# Altium PCB Converter.PcbDoc
Units mm, origin at the board's own origin, x right, y up, seen from the top; angles counter-clockwise.
Board outline 14.5 x 46 mm, 4 copper layers (Top Layer, Layer 1, Layer 2, Bottom Layer), stack 0.603 mm thick; 40 components, 29 nets, 125 pads, 52 vias.
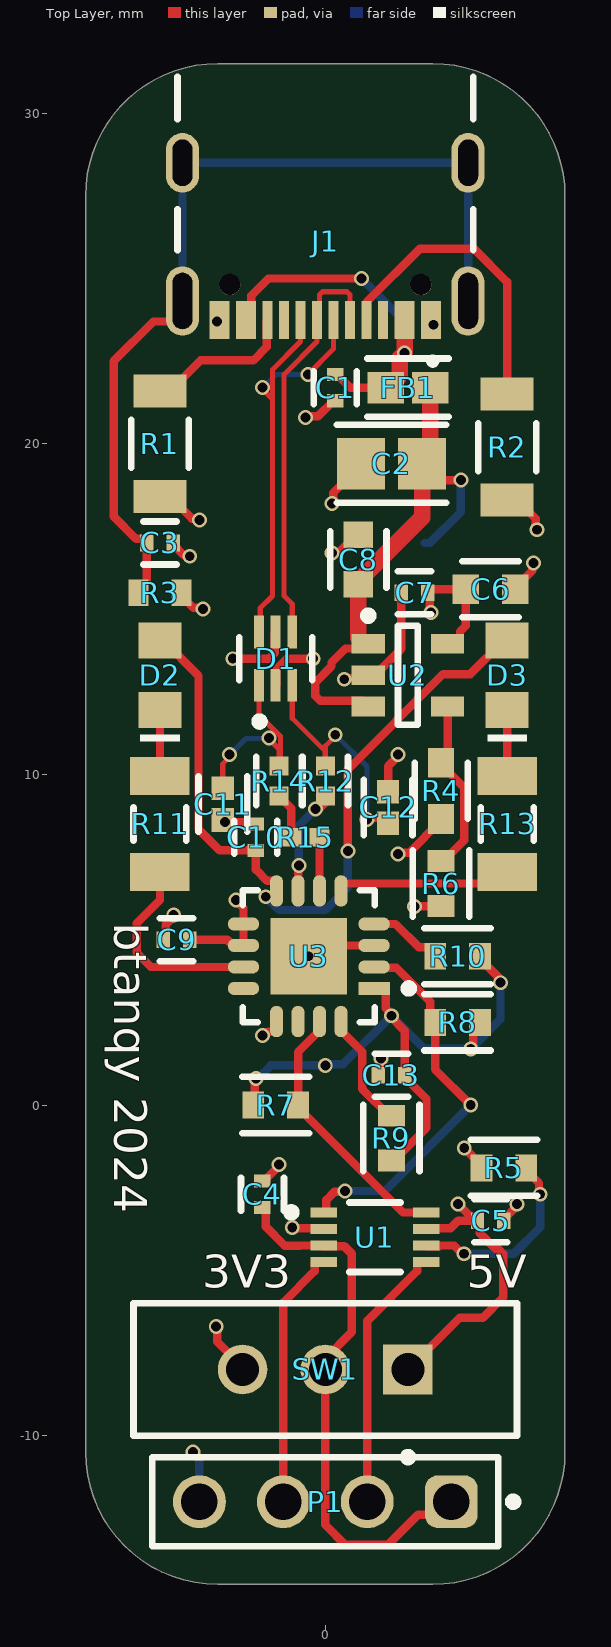
[diagram p0: Top Layer view]
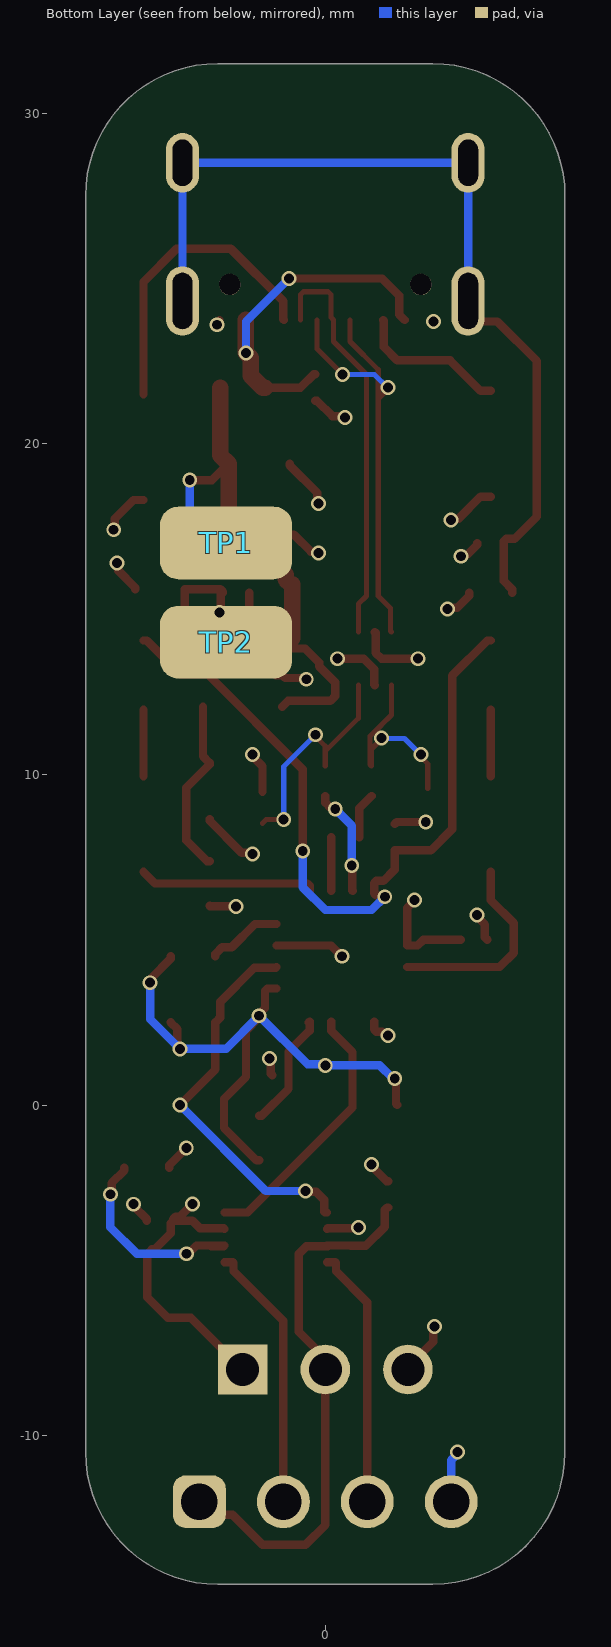
[diagram p1: Bottom Layer view, seen from below]
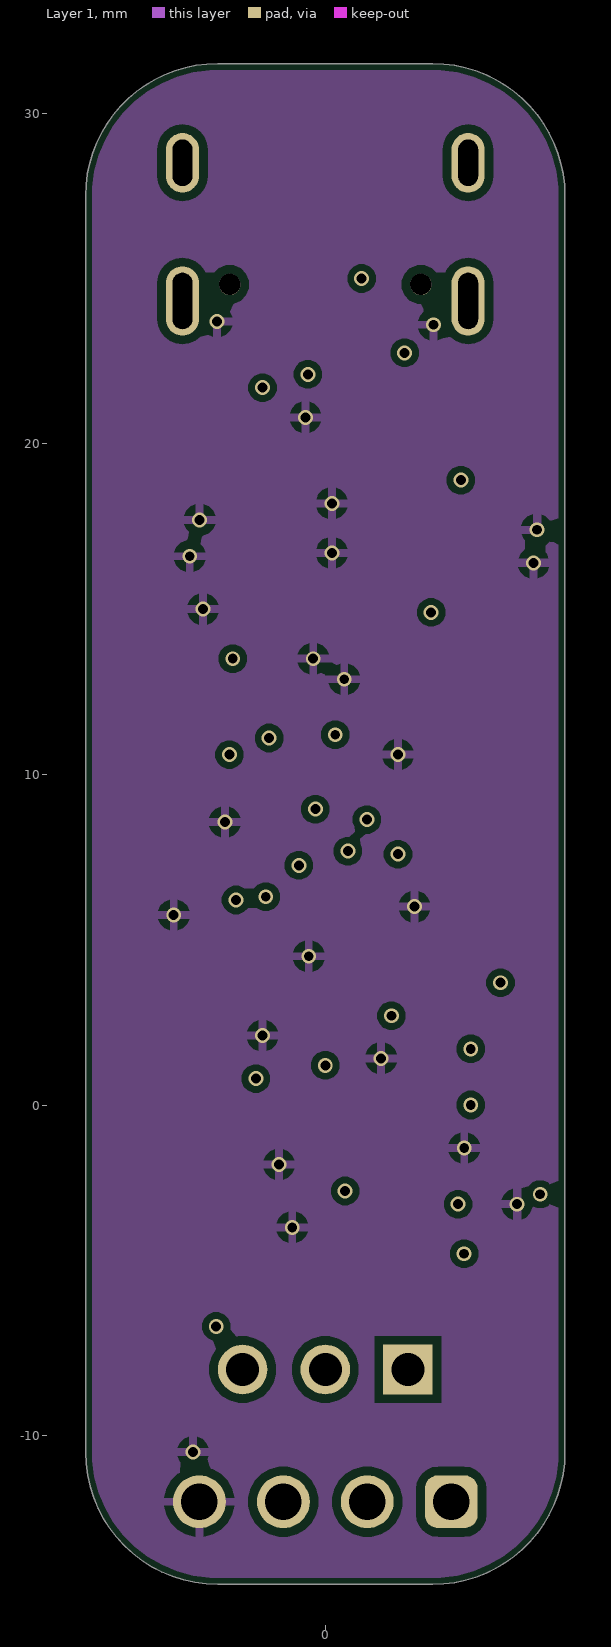
[diagram p2: Layer 1]
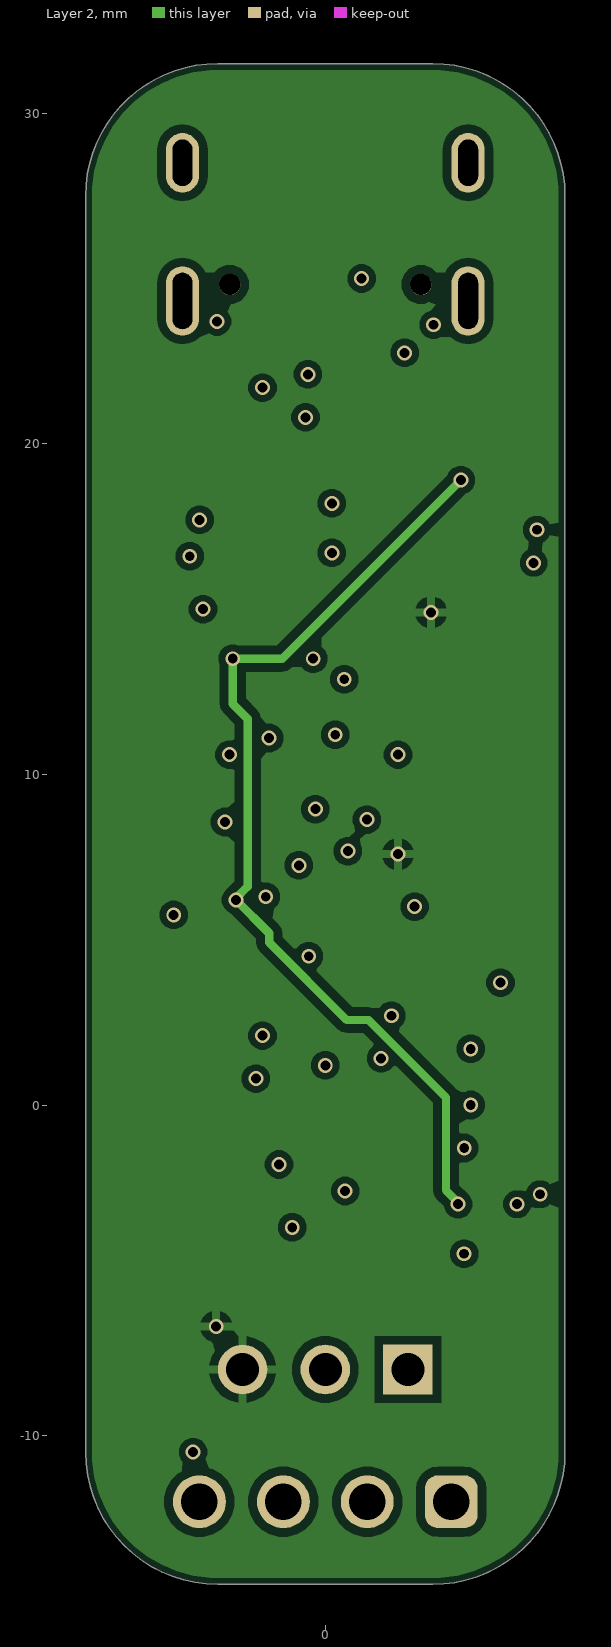
[diagram p3: Layer 2]
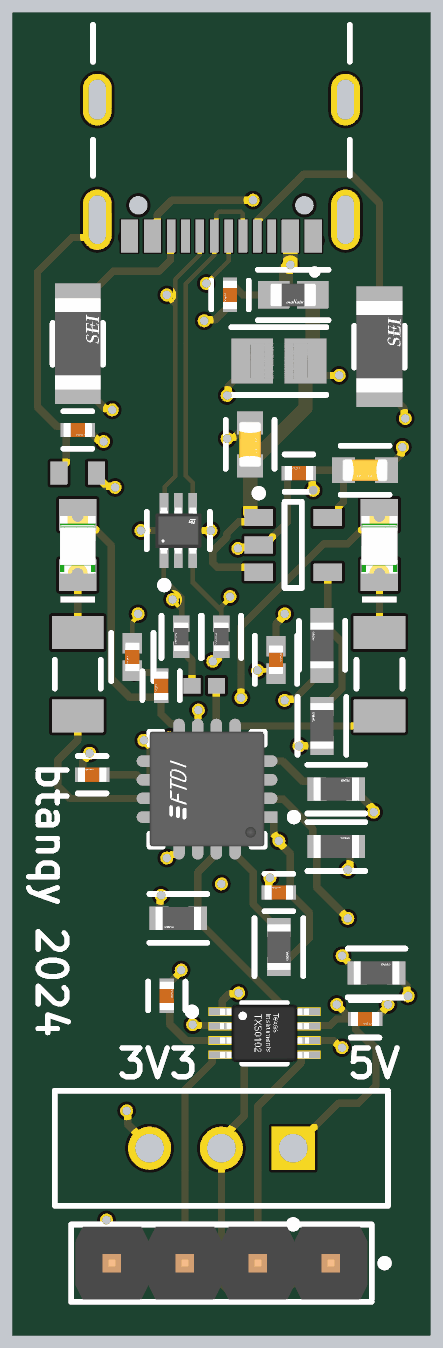
[diagram p4: 3D render of the assembled board from above, using the file's embedded part models]

## Layer stack, top to bottom
Top Solder: solder mask 0.0102, Solder Resist, Dk 3.5
Top Layer: signal copper 0.0356
Dielectric 2: prepreg 0.0711, PP-006, Dk 4.1
Layer 1: signal copper 0.035
Dielectric 1: dielectric 0.32, FR-4, Dk 4.8
Layer 2: signal copper 0.035
Dielectric 3: prepreg 0.0711, PP-006, Dk 4.1
Bottom Layer: signal copper 0.0356
Bottom Solder: solder mask 0.0102, Solder Resist, Dk 3.5

## Board outline
-7.25,-10.5 ccw(c-3.25,-10.5) -3.25,-14.5 3.25,-14.5 ccw(c3.25,-10.5) 7.25,-10.5 7.25,27.5 ccw(c3.25,27.5) 3.25,31.5 -3.25,31.5 ccw(c-3.25,27.5) -7.25,27.5

## Design rules (kind name [scope] priority, off if disabled: settings)
BoardOutlineClearance [All] p1: gap=0.254 ignorepadtopadclearanceinfootprint=FALSE except(0: Arc-SplitContinuation Track-SplitContinuation SMDPad-SplitContinuation THPad-SplitContinuation Via-SplitContinuation Fill-SplitContinuation Poly-SplitContinuation Region-SplitContinuation Text-SplitContinuation; 0.2: Arc-OutlineEdge Track-OutlineEdge SMDPad-OutlineEdge THPad-OutlineEdge Via-OutlineEdge Fill-OutlineEdge Poly-OutlineEdge Region-OutlineEdge Text-OutlineEdge)
Clearance [All] p1: gap=0.254 ignorepadtopadclearanceinfootprint=FALSE except(0.1: Arc-Arc Arc-Track Arc-SMDPad Arc-THPad Track-Track Track-SMDPad Track-THPad; 0.15: SMDPad-SMDPad; 0.2: Arc-Via Track-Via THPad-THPad Via-Via Via-Fill Via-Poly Via-Region; 0.35: SMDPad-Via)
ComponentClearance [All] p1: gap=0.1 collisioncheckmode=3 verticalgap=0.254 showdistances=FALSE
DiffPairsRouting [All] p1: maxlimit=0.254 minlimit=0.18 mostfreqgap=0.254 toplayer_maxgap=0.22 toplayer_prefgap=0.2 toplayer_minwidth=0.1 toplayer_maxwidth=0.2 toplayer_prefwidth=0.155 midlayer1_mingap=0.254 midlayer1_minwidth=0.381 midlayer1_maxwidth=0.381 midlayer1_prefwidth=0.381 midlayer2_mingap=0.254 midlayer2_minwidth=0.381 midlayer2_maxwidth=0.381 midlayer2_prefwidth=0.381 bottomlayer_mingap=0.254 bottomlayer_minwidth=0.381 bottomlayer_maxwidth=0.381 bottomlayer_prefwidth=0.381 maxuncoupledlength=12.7
MinimumSolderMaskSliver [All] p1: minsoldermaskwidth=0.1
PolygonConnect [All] p1: connectstyle=Relief reliefconductorwidth=0.254 reliefentries=4 polygonreliefangle="90 Angle" airgapwidth=0.254
RoutingVias [All] p1: holewidth=0.3 width=0.45 viastyle="Through Hole" minholewidth=0.3 minwidth=0.45 maxholewidth=10 maxwidth=10
SilkToSilkClearance [All] p1: silktosilkclearance=0.15
SolderMaskExpansion [All] p1: expansion=0.102 istentingtop=FALSE
SupplyNets "Schematic Supply Nets_2" [InNet('3V3')] p1: voltage=0.000
SupplyNets "Schematic Supply Nets_1" [InNet('VCC')] p2: voltage=0.000
SupplyNets "Schematic Supply Nets" [InNet('GND')] p3: voltage=0.000
Width [All] p1: maxlimit=10 minlimit=0.1 preferedwidth=0.254 midlayer1_minwidth=0.254 midlayer1_maxwidth=0.254 midlayer2_minwidth=0.254 midlayer2_maxwidth=0.254 minimp=50.000000 maximp=50.000000 favimp=50.000000
26 further rules are at their usual default settings.

## Classes and differential pairs
differential pair D: +D_P -D_N
differential pair DIN: +DIN_P -DIN_N

## Components (designator, comment, footprint, x,y, rotation, side; value= is the part's Value field where it differs from the comment)
C1 "GRM155R71C104KA88J" FP-GRM155-0_05-MFG 0.3,21.7 r270 top
C2 "CL21A475KAQNNNE" FP-CL21-IPC_A 2,19.4 r180 top
C3 "GRM155R71C104KA88J" FP-GRM155-0_05-MFG -5,17 r0 top
C4 "GRM155R71C104KA88J" FP-GRM155-0_05-MFG -1.9,-2.7 r90 top
C5 "GRM155R71C104KA88J" FP-GRM155-0_05-MFG 5,-3.5 r0 top
C6 "CC0603KRX7R7BB105" FP-CC0603-DA-MFG 5,15.6 r0 top value="1 uF"
C7 "GRM155R71C104KA88J" FP-GRM155-0_05-MFG 2.7,15.5 r180 top
C8 "CC0603KRX7R7BB105" FP-CC0603-DA-MFG 1,16.5 r90 top value="1 uF"
C9 "GRM155R71C104KA88J" FP-GRM155-0_05-MFG -4.5,5 r180 top
C10 "GRM155R71C104KA88J" FP-GRM155-0_05-MFG -2.1,8.1 r270 top
C11 "GJM1555C1H470GB01D" FP-GJM155-0_05-IPC_A -3.1,9.1 r270 top
C12 "GJM1555C1H470GB01D" FP-GJM155-0_05-IPC_A 1.9,9 r90 top
C13 "GRM155R71C104KA88J" FP-GRM155-0_05-MFG 2,0.9 r180 top
D1 "USBLC6-2P6" FP-SOT-666-MFG -1.5,13.5 r90 top
D2 "150080RS75000" WL-SMCW_0805_150080xx75000 -5,13 r90 top
D3 "150080RS75000" WL-SMCW_0805_150080xx75000 5.5,13 r90 top
FB1 "BLM18PG600SN1D" FP-BLM18-0_15-t0_8-IPC_B 2.5,21.7 r0 top
J1 "GT-USB-7010ASV" GCT_USB4105-GF-A 0,28.5 r180 top
P1 "61300411121" 61300411121 0,-12 r180 top
R1 "RMCF1206JT56K0" FP-RMCF1206-MFG -5,20 r90 top
R2 "RMCF1206JT56K0" FP-RMCF1206-MFG 5.5,19.9 r90 top
R3 "1M" RESC1608X55X25LL10T15 -5,15.5 r0 top
R4 "RT0603BRD0732KL" FP-RT0603-0_55-MFG 3.5,9.5 r90 top
R5 "RC0603FR-0710KL" FP-RC0603-0_55-IPC_C 5.4,-1.9 r0 top
R6 "RC0603FR-0710KL" FP-RC0603-0_55-IPC_C 3.5,6.7 r90 top
R7 "RC0603FR-0710KL" FP-RC0603-0_55-IPC_C -1.5,0 r180 top
R8 "RC0603FR-0710KL" FP-RC0603-0_55-IPC_C 4,2.5 r0 top
R9 "RC0603FR-0710KL" FP-RC0603-0_55-IPC_C 2,-1 r270 top
R10 "RC0603FR-0710KL" FP-RC0603-0_55-IPC_C 4,4.5 r0 top
R11 "62R 1% 1206(3216)" RESC1206(3216)_N -5,8.5 r270 top value=62.00
R12 "ERJ-2RKF27R0X" FP-ERJ2R-IPC_B 0,9.8 r270 top
R13 "62R 1% 1206(3216)" RESC1206(3216)_N 5.5,8.5 r270 top value=62.00
R14 "ERJ-2RKF27R0X" FP-ERJ2R-IPC_B -1.4,9.8 r270 top
R15 "RC0402JR-070RL" RESC1005X40X25NL05T10 -0.6,8.1 r180 top value=0
SW1 "EG1218" ESWI-EG1218_V 0,-8 r180 top
TP1 "RH-5019" RH-5019-Footprint-1 3,17 r180 bottom
TP2 "RH-5019" RH-5019-Footprint-1 3,14 r180 bottom
U1 "TXS0102DCUR" FP-DCU0008A-MFG 1.5,-4 r0 top
U2 "RS3236-ADJ8YF5" SOT95P245X110-5N 2.5,13 r0 top
U3 "FT230XQ-R" FP-QFN-16-MFG -0.5,4.5 r180 top

## Footprints (in the part's own frame and the unit in brackets; to place one, negate y for a bottom-side part, rotate by r counter-clockwise, add the part's x,y. Pads: shape width x height; smd on the part's side, far side on the other; paste and mask are expansions set on the pad)
61300411121 [mm] "Pin Header, pitch 2.54 mm, THT, Vertical, single row, 4p"
  rrect50% 1.6x1.6 hole 1.1: 1(-3.81,0)
  round 1.6 hole 1.1: 2(-1.27,0) 3(1.27,0) 4(3.81,0)
  silkscreen extent -5.8,-1.35 5.23,1.35, body extent -5.08,-1.27 5.08,1.27, height 8.57
ESWI-EG1218_V [mm] "THD, 3-Leads, Body 11.6x4mm, Pitch 2.5mm"
  rect 1.5x1.5 hole 1: 1(-2.5,0)
  round 1.5 hole 1: 2(0,0) 3(2.5,0)
  silkscreen extent -5.8,-2 5.8,2.77, body extent -5.8,-2 5.8,2, height 7.4
FP-BLM18-0_15-t0_8-IPC_B [mm]
  rect 1.106x0.958 smd paste+0 mask+0: 1(-0.676,0) 2(0.676,0)
  silkscreen extent -1.23,-0.88 1.23,0.88, body extent -1.48,-0.73 1.48,0.73, height 0.25
FP-CC0603-DA-MFG [mm]
  rect 0.8x0.9 smd paste+0 mask+0: 1(-0.75,0) 2(0.75,0)
  silkscreen extent -0.85,-0.85 0.85,0.85, body extent -1.35,-0.75 1.35,0.75, height 0.25
FP-CL21-IPC_A [mm]
  rect 1.455x1.556 smd paste+0 mask+0: 1(-0.926,0) 2(0.926,0)
  silkscreen extent -1.65,-1.18 1.65,1.18, body extent -2.15,-1.28 2.15,1.28, height 0.25
FP-DCU0008A-MFG [mm]
  rect 0.8x0.3 smd paste-1000 mask+0: 1(-1.55,0.75) 2(-1.55,0.25) 3(-1.55,-0.25) 4(-1.55,-0.75) 5(1.55,-0.75) 6(1.55,-0.25) 7(1.55,0.25) 8(1.55,0.75)
  silkscreen extent -2.65,-1.05 0.77,1.05, body extent -2.05,-1.3 2.05,1.3, height 0.25
FP-ERJ2R-IPC_B [mm]
  rect 0.568x0.572 smd paste+0 mask+0: 1(-0.452,0) 2(0.452,0)
  silkscreen extent -0.74,-0.69 0.74,0.69, body extent -0.89,-0.44 0.89,0.44, height 0.25
FP-GJM155-0_05-IPC_A [mm]
  rect 0.715x0.672 smd paste+0 mask+0: 1(-0.479,0) 2(0.479,0)
  silkscreen extent -0.84,-0.74 0.84,0.74, body extent -1.04,-0.54 1.04,0.54, height 0.25
FP-GRM155-0_05-MFG [mm]
  rect 0.4x0.5 smd paste+0 mask+0: 1(-0.4,0) 2(0.4,0)
  silkscreen extent -0.5,-0.65 0.5,0.65, body extent -0.7,-0.38 0.7,0.38, height 0.25
FP-QFN-16-MFG [mm]
  rect 0.95x0.4 smd paste+0 mask+0: 1(-1.975,0.975)
  rrect100% 0.95x0.4 smd paste+0 mask+0: 2(-1.975,0.325) 3(-1.975,-0.325) 4(-1.975,-0.975) 9(1.975,-0.975) 10(1.975,-0.325) 11(1.975,0.325) 12(1.975,0.975)
  rrect100% 0.4x0.95 smd paste+0 mask+0: 5(-0.975,-1.975) 6(-0.325,-1.975) 7(0.325,-1.975) 8(0.975,-1.975) 13(0.975,1.975) 14(0.325,1.975) 15(-0.325,1.975) 16(-0.975,1.975)
  rect 2.3x2.3 smd paste+0 mask+0: 17(0,0)
  silkscreen extent -3.15,-2 2,2, body extent -2.55,-2.55 2.55,2.55, height 0.25
FP-RC0603-0_55-IPC_C [mm]
  rect 0.659x0.812 smd paste+0 mask+0: 1(-0.677,0) 2(0.677,0)
  silkscreen extent -1.01,-0.85 1.01,0.85, body extent -1.11,-0.55 1.11,0.55, height 0.25
FP-RMCF1206-MFG [mm]
  rect 1x1.6 smd paste+0 mask+0: 1(-1.6,0) 2(1.6,0)
  silkscreen extent -0.72,-0.87 0.72,0.87, body extent -2.2,-0.97 2.2,0.97, height 0.25
FP-RT0603-0_55-MFG [mm]
  rect 0.9x0.8 smd paste+0 mask+0: 1(-0.85,0) 2(0.85,0)
  silkscreen extent -0.85,-0.81 0.86,0.8, body extent -1.4,-0.55 1.4,0.55, height 0.25
FP-SOT-666-MFG [mm]
  rect 0.99x0.3 smd paste+0 mask+0: 1(-0.805,0.5) 2(-0.805,0) 3(-0.805,-0.5) 4(0.805,-0.5) 5(0.805,0) 6(0.805,0.5)
  silkscreen extent -2.02,-1.1 0.65,1.1, body extent -1.4,-0.95 1.4,0.95, height 0.25
GCT_USB4105-GF-A [mm]
  round 0.65 hole 0.65 unplated: 0(-2.89,3.68) 0(2.89,3.68)
  rect 0.6x1.15 smd mask+0.05: A1_B12(-3.2,4.755) A4_B9(-2.4,4.755) B1_A12(3.2,4.755) B4_A9(2.4,4.755)
  rect 0.3x1.15 smd mask+0.05: A5(-1.25,4.755) A6(-0.25,4.755) A7(0.25,4.755) A8(1.25,4.755) B5(1.75,4.755) B6(0.75,4.755) B7(-0.75,4.755) B8(-1.75,4.755)
  oval 1x2.1 hole 0.6 slot 1.7 at 90 deg: SH1(-4.32,4.18) SH2(4.32,4.18)
  oval 1x1.8 hole 0.6 slot 1.4 at 90 deg: SH3(-4.32,0) SH4(4.32,0)
  silkscreen extent -4.47,-2.6 4.47,6.1
RESC1005X40X25NL05T10 [mm] "Chip Resistor, 2-Leads, Body 1.00x0.50mm, IPC Medium Density"
  rect 0.6x0.55 smd: 1(-0.425,0) 2(0.425,0)
  body extent -0.53,-0.27 0.53,0.28, height 0.4
RESC1206(3216)_N [mm] "Chip Resistor, Body 3.2x1.6mm, IPC Medium Density"
  rect 1.15x1.8 smd: 1(-1.45,0) 2(1.45,0)
  silkscreen extent -0.5,-0.8 0.5,0.8, body extent -1.67,-0.87 1.67,0.87, height 0.75
RESC1608X55X25LL10T15 [mm] "Chip Resistor, 2-Leads, Body 1.70x0.90mm, IPC High Density"
  rect 0.6x0.8 smd: 1(-0.65,0) 2(0.65,0)
  body extent -0.85,-0.45 0.85,0.45, height 0.55
RH-5019-Footprint-1 [mm]
  rrect50% 4x2.2 smd: 1(0,0)
SOT95P245X110-5N [mm] "SOT23, 5-Leads, Body 2.90x2.45mm, Pitch 0.95mm, IPC Medium Density"
  rect 1x0.6 smd: 1(-1.2,0.95) 2(-1.2,0) 3(-1.2,-0.95) 4(1.2,-0.95) 5(1.2,0.95)
  silkscreen extent -1.32,-1.5 0.3,1.92, body extent -0.7,-1.5 0.7,1.5, height 1.1
WL-SMCW_0805_150080xx75000 [mm] "SMD Mono-color Chip LED, body 2.0x1.25mm"
  rect 1.1x1.3 smd: 1(-1.05,0) 2(1.05,0)
  silkscreen extent -2,-0.6 -1.8,0.6, body extent -1,-0.63 1,0.62, height 0.7

## Part data
C1 C3 C4 C5 C7 C9 C10 C13: library part CMP-2008-03928-2, Capacitance=100nF, Case Code (Imperial)=0402, Case Code (Metric)=1005, Dielectric=X7R, Manufacturer Lifecycle Status=NRND, Max Operating Temperature=125°C, Min Operating Temperature=-55°C, Tolerance=10%, Voltage=16V, Case/Package=0402, Depth=500µm, Height=550µm, Lead Free="Lead Free", Length=1mm, Material=Ceramic, Mount="Surface Mount", NexarPartId=9223238, Number of Pins=2, Packaging="Cut Tape", Radiation Hardening=No, REACH SVHC="No SVHC", RoHS=Compliant, Schedule B="8532240020, 8532240020", Termination=SMD/SMT, Thickness=500µm, Voltage Rating=16V, Voltage Rating (DC)=16V, Width=500µm
C2: library part CMP-13271-002624-1, "CL21 Series 0805 4.7uF 25V ±10% Tolerance X5R Multilayer Ceramic Chip Capacitor", Capacitance=4.7uF, Case Code (Imperial)=0805, Case Code (Metric)=2012, Dielectric=X5R, Max Operating Temperature=85°C, Min Operating Temperature=-55°C, Package Quantity=1, Tolerance=10%, Voltage Rating=25V, Case/Package=0805, Depth=1.25mm, Height=1.25mm, Lead Free="Lead Free", Length=2mm, Mount="Surface Mount", Packaging="Tape and Reel", Radiation Hardening=No, Thickness=0.055inch, Voltage Rating (DC)=25V, Width=0.049inch
C6 C8: library part CMP-03422-000924-1, "CAP CER 1UF 16V X7R 0603", Capacitance="1 uF", Manufacturer=YAGEO, Package=CC0603-DA, Temperature="-55°C to +125°C", Temperature Characteristic=X7R, Temperature Coefficient=15%, Temperature Range High=+125°C, Temperature Range Low=-55°C, Tolerance=0.1, Voltage="16 V", Automotive=No, Category=Cap, ComponentLink2Description=Datasheet, ComponentLink2URL=http://www.yageo.com/documents/recent/UPY-GPHC_X7R_6.3V-to-50V_18.pdf, Device Class L1="Passive Components", Device Class L2=Capacitors, Device Class L3="Ceramic Capacitors", Digikey Description="CAP CER 1UF 16V X7R 0603", Footprint Url=http://www.yageo.com/exep/pages/download/literatures/UPY-C_GEN_24.pdf, Height=0.9mm, Lead Free=Yes, Manufacturer Part Number=CC0603KRX7R7BB105, Material=Ceramic, Mouser Description="Multilayer Ceramic Capacitor, CC Series, 1 - F, - 10%, X7R, 16 V, 0603 [1608 Metric]", Octopart=https://octopart.com/cc0603krx7r7bb105-yageo-42271928, RoHS=TRUE, Voltage Rating="16 V"
C11 C12: library part CMP-06035-055949-1, "Multi-Layer Ceramic Capacitor 47pF C0G  ±2% 0402 Paper T/R", Capacitance=47pF, Dielectric=C0G, Tolerance=2%, Voltage Rating (DC)=50V, Length=1mm, Thickness=500um, Width=500um
D1: library part CMP-12225-000058-1, "TVS DIODE 5.25V 17V SOT666", Breakdown Voltage=6V, Capacitance=3.5pF, Case/Package=SOT-666, Clamping Voltage=17V, Leakage Current=150nA, Max Operating Temperature=125°C, Min Operating Temperature=-40°C, Operating Supply Voltage=5V, Package Quantity=1, Peak Pulse Current=5A, Power Line Protection=Yes, Test Current=1mA, Contact Plating=Tin, Depth=1.3mm, Direction=Unidirectional, Element Configuration=Dual, ESD Protection=Yes, Height=0.6mm, Lead Free="Lead Free", Length=1.7mm, Max Breakdown Voltage=6V, Max Reverse Leakage Current=150nA, Min Breakdown Voltage=6V, Mount="Surface Mount", Number of Bidirectional Channels=2, Number of Channels=2, Number of Elements=1, Number of Pins=6, Packaging="Tape and Reel", Polarity=Unidirectional, Radiation Hardening=No, REACH SVHC="No SVHC", Reverse Breakdown Voltage=6V, Reverse Standoff Voltage=5V, Termination=SMD/SMT, Width=1.3mm, Working Voltage=5V
D2 D3: library part CMP-1426-00011-3, "LED Uni-Color Red 630nm 2-Pin Chip 0805(2012Metric) T/R", Case Code (Imperial)=0805, Case Code (Metric)=2012, Color=Red, Forward Current=100mA, Forward Voltage=2V, Max Junction Temperature (Tj)=95°C, Max Operating Temperature=85°C, Max Reverse Voltage (DC)=5V, Min Operating Temperature=-40°C, Power Dissipation=72mW, Test Current=20mA, Case/Package=0805, Dominant Wavelength=625nm, Height=700µm, Length=2mm, Lens Style="Clear, Rectangular", Luminous Intensity=150mcd, Mount="Surface Mount", Packaging="Tape and Reel", Peak Wavelength=630nm, REACH SVHC=Unknown, RoHS=Compliant, Viewing Angle=140°, Wavelength=625nm, Width=1.25mm
FB1: library part CMP-0686-00575-3, "Chip Ferrite Bead, 0603, 60Ω @ 100MHz, 0.1Ω, , 1A", Case Code (Imperial)=0603, Case Code (Metric)=1608, Current Rating=500mA, DC Resistance (DCR)=100mR, ESR (Equivalent Series Resistance)=60R, Frequency=100MHz, Max Operating Temperature=125°C, Min Operating Temperature=-55°C, Package Quantity=1, Tolerance=25%, Case/Package=0603, Core Material=Ferrite, Depth=0.8mm, Height=0.8mm, Impedance=60R, Lead Free="Lead Free", Length=1.6mm, Material=Steel, Max Current Rating=500mA, Max DC Current=500mA, Number of Circuits=1, Number of Lines=1, Number of Pins=2, Packaging="Tape and Reel", REACH SVHC="No SVHC", Resistance=100mR, RoHS Compliant=Yes, Shielding=Unshielded, Termination=SMD/SMT, Test Frequency=100MHz, Width=0.8mm
J1: library part CMP-002-00073-1, "USB-C 2.0"
P1: library part CMP-1502-01064-3, Color=Black, Contact Resistance=20mΩ, Current Rating=3A, Max Operating Temperature=105°C, Min Operating Temperature=-40°C, Operating Supply Voltage=250V, Connector Type="Male Pin", Contact Material=Copper, Contact Mating Length=5.9944mm, Contact Plating=Gold, Gender=Male, Height=8.89mm, Lead Free="Lead Free", Lead Pitch=2.54mm, Mount="Through Hole", NexarPartId=32855522, Number of Contacts=4, Number of Pins=4, Number of Positions=4, Number of Rows=1, Orientation=Vertical, Packaging=Bulk, Pitch=2.54mm, REACH SVHC=Unknown, RoHS=Compliant, Termination=Solder, Voltage Rating=250V
R1 R2: library part CMP-26527-003341-1, "56kΩ ±5% 0.25W 1206 Thick Film Chip Resistor AEC-Q200 compliant", Case Code (Imperial)=1206, Case Code (Metric)=3216, Max Operating Temperature=155°C, Max Power Dissipation=250mW, Min Operating Temperature=-55°C, Resistance=56k, Resistor Type="Thick Film", Temperature Coefficient=200ppm/°C, Tolerance=5%, Case/Package=1206, Construction=Rectangular, Contact Plating=Tin, Depth=1.6mm, Features="Automotive AEC-Q200", Height=0.028inch, Lead Free="Lead Free", Length=0.126inch, Military Standard=Not, Mount="Surface Mount", Number of Terminations=2, Packaging="Tape and Reel", Power Rating=250mW, Radiation Hardening=No, RoHS Compliant=Yes, Series=RMCF, Size Code=1206, Width=0.063inch
R3: library part CMP-1659-00056-1, "Chip Resistor, 1 MOhm, +/- 1%, 100 mW, -55 to 155 degC, 0603 (1608 Metric), RoHS, Tape and Reel", Capacitance="1 mF", Case\Package=Radial, Max Operating Temperature="85 degC", Min Operating Temperature="-40 degC", Package Quantity=200, Tolerance=20%, Voltage Rating="25 V", ComponentLink1Description="Manufacturer URL", ComponentLink1URL=http://www.yageo.com/, ComponentLink2Description=Datasheet, ComponentLink2URL=http://www.yageo.com/documents/recent/PYu-RC_Group_51_RoHS_L_04.pdf, DatasheetVersion="Rev. 4, 02/2016", Diameter="10 mm", Height="20 mm", Lead Pitch="5 mm", Length="20 mm", Mount="Through Hole", PackageDescription="2-Pin Surface Mount Device, Body 1.6 x 0.8 mm", PackageReference=0603, Packaging=Bulk, Radiation Hardening=No, REACH SVHC="No SVHC", RoHSCompliant=true, Voltage Rating (DC)="25 V", Width="0 inch"
R4: library part CMP-00621-34935746-1, "RT0603BRD0732KL High Precision-High Stability Chip Resistor Thin Film 0603 32kOhm 0.1% Paper T/R", Case/Package=0603, Max Operating Temperature=155°C, Max Power Dissipation=100mW, Min Operating Temperature=-55°C, Resistance=32kΩ, Temperature Coefficient=25ppm/°C, Tolerance=0.1%, Composition="Thin Film", Features="Moisture Resistant", Height=558.8µm, Length=1.6002mm, NexarPartId=34935746, Number of Terminations=2, Packaging="Tape & Reel", RoHS=Compliant, Width=787.4µm
R5 R6 R7 R8 R9 R10: library part CMP-2100-03664-2, "RES 10K OHM 1% 1/10W 0603", Case Code (Imperial)=0603, Case Code (Metric)=1608, Max Operating Temperature=155°C, Max Power Dissipation=100mW, Min Operating Temperature=-55°C, Resistance=10k, Resistance Tolerance=1%, Resistor Type="Thick Film", Temperature Coefficient=100ppm/°C, Voltage Rating=75V, Voltage Rating (DC)=50V, Case/Package=0603, Construction=Rectangular, Depth=0.8mm, Features="Moisture Resistant", Height=0.45mm, Lead Free="Lead Free", Lead Pitch=0.3mm, Length=1.6mm, Military Standard=Not, Number of Pins=2, Number of Terminations=2, Packaging="Tape and Reel", Power Rating=100mW, RoHS Compliant=Yes, Series=RC, Size Code=0603, Termination=SMD/SMT, Tolerance=1%, Weight=7.1E-05oz, Width=0.8mm
R11 R13: library part CMP-1014-00373-1, "62R 0.25W 1% 1206 (3216 Metric)  SMD", Case-EIA=1206, Case-Metric=3216, Power="0.25 W", Tolerance="1 %", Technology=SMT
R12 R14: library part CMP-2002-00830-2, "RES SMD 27 OHM 1% 1/10W 0402", Case Code (Imperial)=0402, Case Code (Metric)=1005, Max Operating Temperature=155°C, Max Power Dissipation=100mW, Min Operating Temperature=-55°C, Package Quantity=1, Resistance=27, Resistance Tolerance=1%, Resistor Type="Thick Film", Temperature Coefficient=100ppm/°C, Voltage Rating=50V, Case/Package=0402, Construction=Rectangular, Contact Plating=Tin, Depth=0.5mm, Features="Automotive AEC-Q200", Height=0.35mm, Lead Free="Lead Free", Length=1mm, Military Standard=Not, Mount="Surface Mount", Number of Pins=2, Number of Terminations=2, Packaging="Tape and Reel", Power Rating=100mW, Radiation Hardening=No, REACH SVHC="No SVHC", RoHS Compliant=Yes, Series=ERJ, Technology="THICK FILM", Termination=SMD/SMT, Tolerance=1%, Voltage Rating (DC)=50V, Weight=2.8E-05oz, Width=0.5mm
R15: library part CMP-1011-00001-2, Manufacturer="Yageo / Phycomp", Part Number=RC0402JR-070RL
SW1: library part CMP-1696-00002-1, "Slide Switch, 500 V, -20 to 70 degC, 3-Pin THD, RoHS", Case\Package=SOT-23-5, Dropout Voltage="300 mV", Max Input Voltage="8 V", Max Operating Temperature="85 degC", Max Ouput Current="150 mA", Max Power Dissipation="250 mW", Min Input Voltage="4.3 V", Min Operating Temperature="-40 degC", Nominal Output Voltage="3.3 V", Package Quantity=3000, ComponentLink1Description="Manufacturer URL", ComponentLink1URL=http://www.e-switch.ch/en/, ComponentLink2Description=Datasheet, ComponentLink2URL=https://www.e-switch.com/system/asset/product_line/data_sheet/119/EG.pdf, DatasheetVersion=Oct-15, Height="1.3 mm", Length="3 mm", Mount="Surface Mount", Output Current="150 mA", Output Voltage="3.3 V", Outputs=1, PackageDescription="3-Pin Through Hole Device, Body 11.6 x 4 mm, Pitch 2.5 mm", PackageReference=EG1218, Packaging="Tape and Reel", Pins=5, Power Rating="250 mW", Radiation Hardening=No, REACH SVHC="No SVHC", RoHSCompliant=true, Width="1.8 mm"
TP1 TP2: library part CMP-00030-00001-2, "PC Test Point"
U1: library part CMP-0859-00001-2, "IC TRNSLTR BIDIRECTIONAL US8", Ambient Temperature Range High=+85°C, Ambient Temperature Range Low=-40°C, Manufacturer="Texas Instruments", Max Junction Temp=+150°C, Max Supply Voltage=5.5V, Min Supply Voltage=1.65V, Nominal Supply Current=1-14.4uA, Package=DCU0008A, Temperature="-40°C to +85°C", Automotive=No, Category=IC, ComponentLink2Description=Datasheet, ComponentLink2URL=http://www.ti.com/lit/ds/symlink/txs0102.pdf, Data Rate=24Mbits/s, Device Class L1="Integrated Circuits (ICs)", Device Class L2="Logic ICs", Device Class L3="Voltage Level Shifters", Digikey Description="IC TRNSLTR BIDIRECTIONAL US8", Height=0.9mm, Lead Free=Yes, Logic Function Desc="Bidirectional Voltage-Level Translator", Manufacturer Part Number=TXS0102DCUR, Mouser Description="Translation - Voltage Levels 2-Bit Bi-Directional Voltage-Level-Trans", Number of Circuits=1, Number Of Inputs=2, Number Of Outputs=2, Octopart=https://octopart.com/txs0102dcur-texas+instruments-5414308, RoHS=TRUE, Standoff Height=0mm, Temperature Range High=+85°C, Temperature Range Low=-40°C, V A Max=3.6V, V A Min=1.65V, V B Max=5.5V, V B Min=2.3V
U2: library part CMP-019-00049-2, "IC Reg Lin Pos Adj 500MA SOT23-5"
U3: library part CMP-0248-00010-3, "IC USB SERIAL BASIC UART 16QFN", Case/Package=QFN, Max Operating Temperature=85°C, Max Supply Voltage=5.5V, Min Operating Temperature=-40°C, Min Supply Voltage=2.97V, Operating Supply Current=8mA, Operating Supply Voltage=5V, Package Quantity=5000, Data Rate=12Mbps, Height=0.75mm, Interface=USB, Lead Free="Lead Free", Length=4mm, Mount="Surface Mount", Number of Channels=1, Number of Pins=16, Packaging="Tape and Reel", Weight=0.002014oz, Width=4mm

## Via types
v1: diameter 0.45, hole 0.3, Top Layer to Bottom Layer, 52 vias

## Nets (pads, with @x,y where several pads share a name; then routed paths per layer and width w, separated by ;. In a path a pad name is that pad's centre, name@x,y a point inside that pad or via, vN(x,y) a via of type N, cw(c..) or ccw(c..) an arc to the next point about the centre after c; other vN are vias at no path point)
3V3: C6.1 C7.1 R4.1 SW1.3 TP2.1 U2.5 | length 7.2
  Top Layer w0.254: v1(-3.3,-6.7) -3.262,-6.738 -3.262,-7.163 -2.5,-7.926 SW1.3 ; v1(2.2,7.589) 2.238,7.626 2.526,7.626 3.5,8.6 R4.1 ; v1(3.2,14.9) 3.162,14.938 3.162,15.438 C7.1 3.1,15.527 3.173,15.6 C6.1 4.25,14.5 4.073,14.323 4.073,14.123 3.9,13.95 U2.5
3V3OUT: C10.2 D2.2 D3.2 U3.8 | length 23.2
  Top Layer w0.254: D2.2 -4.9,14.05 -3.835,12.985 -3.835,8.342 -3.194,7.7 C10.2 -2.1,7.119 -1.759,6.778 -1.542,6.778 -1.475,6.71 U3.8 -1.475,6.405 -1.542,6.338 -1.762,6.338 v1(-1.8,6.3) ; v1(0.681,7.679) 0.681,10.152 3.564,13.036 4.386,13.036 5.4,14.05 D3.2
  Bottom Layer w0.254: v1(-1.8,6.3) -1.4,5.9 0,5.9 0.681,6.581 v1(0.681,7.679)
CC2: J1.B5 R1.2 | length 4.6
  Top Layer w0.254: R1.2 -4.7,21.6 -3.776,22.524 -2.176,22.524 -1.773,22.927 -1.773,23.722 J1.B5
CTS: R10.1 U3.4 | length 2.3
  Top Layer w0.254: U3.4 2.125,5.475 2.829,4.771 3.121,4.771 3.323,4.569 R10.1
D_N: C12.1 D1.3 R12.1 | length 7.1
  Top Layer w0.155: D1.3 -1,11.7 0,10.7 ; R12.1 0,10.7 ; v1(0.3,11.2) 0.3,11.153 0,10.853 0,10.7 ; v1(1.258,8.634) 1.788,8.634 C12.1
  Bottom Layer w0.155: v1(0.3,11.2) 1.258,10.242 v1(1.258,8.634)
D_P: C11.1 D1.1 R14.1 | length 6.2
  Top Layer w0.155: C11.1 -3.1,10.32 -2.9,10.52 v1(-2.9,10.6) ; D1.1 -2,11.8 -1.7,11.5 -1.7,11.498 -1.355,11.153 -1.355,10.297 R14.1 -1.4,10.769 -1.7,11.069 v1(-1.7,11.1)
  Bottom Layer w0.155: v1@-2.881,10.6 -2.395,11.087 v1@-1.713,11.087
  Bottom Layer w0.381: v1(-2.9,10.6) v1@-2.881,10.6 ; v1@-1.713,11.087 v1(-1.7,11.1)
DIN_N: D1.4 J1.A7 J1.B7 | length 12.5
  Top Layer w0.155: D1.4 -1,15.155 -1.245,15.4 -1.245,22.095 -0.25,23.09 J1.A7 -0.178,23.818 -0.178,24.509 -0.087,24.6 0.659,24.6 0.75,24.509 J1.B7
DIN_P: D1.6 J1.A6 J1.B6 | length 13.9
  Top Layer w0.155: D1.6 -1.967,14.338 -1.967,15.033 -1.6,15.4 -1.6,21.353 ; v1(-1.9,21.7) -1.9,21.653 -1.6,21.353 ; J1.B6 -0.75,23.093 -1.6,22.243 -1.6,21.353 ; v1(-0.525,22.1) 0.25,22.875 J1.A6
  Bottom Layer w0.155: v1@-1.881,21.7 -1.481,22.1 v1(-0.525,22.1)
  Bottom Layer w0.381: v1(-1.9,21.7) v1@-1.881,21.7
GND: C1.2 C2.2 C3.2 C4.2 C5.2 C6.2 C7.2 C8.2 C9.2 C10.1 C11.2 C12.2 C13.2 D1.2 J1.A1_B12 J1.B1_A12 P1.4 R1.1 R2.1 R3.2 R5.1 R6.1 U1.2 U2.2 U3.3 U3.13 U3.17 | length 27.2
  Top Layer w0.254: R1.1 -4.7,18.4 -4.038,17.738 -3.838,17.738 v1(-3.8,17.7) ; C9.2 -4.827,5.073 -4.827,5.454 -4.585,5.696 v1(-4.585,5.749) ; C3.2 -4.6,16.95 -4.288,16.638 -4.138,16.638 v1(-4.1,16.6) ; R3.2 -4.35,15.4 -3.988,15.038 -3.738,15.038 v1(-3.7,15) ; v1(-3.275,23.7) -3.245,23.7 J1.B1_A12 ; C11.2 v1(-3.039,8.561) -2.161,8.561 C10.1 ; C4.2 -1.85,-2.3 -1.4,-1.85 v1(-1.4,-1.8) ; v1(-1.9,2.1) -1.847,2.1 -1.725,2.222 -1.542,2.222 -1.475,2.29 U3.13 ; D1.2 -1.477,12.718 -1.477,13.184 -1.161,13.5 v1(-0.366,13.5) ; v1(-1,-3.7) -0.973,-3.727 -0.073,-3.727 U1.2 ; v1(-0.6,20.8) -0.562,20.838 -0.212,20.838 0.25,21.3 C1.2 ; v1(-0.5,4.5) -0.175,4.825 U3.3 ; v1(0.2,16.7) 0.238,16.738 0.438,16.738 0.95,17.25 C8.2 ; v1(0.2,18.2) 0.238,18.238 0.238,18.513 1.074,19.349 C2.2 ; v1(0.575,12.879) 0.612,12.916 1.216,12.916 U2.2 1.5,13 2.3,13.8 C7.2 ; C13.2 1.651,0.951 1.651,1.374 v1(1.688,1.412) ; C12.2 1.9,10.247 2.2,10.547 v1(2.2,10.6) ; v1(2.7,6) 2.712,6.012 3.488,6.012 R6.1 ; J1.A1_B12 3.2,23.675 v1(3.275,23.6) ; v1(4.204,-1.3) 4.204,-1.304 4.723,-1.823 R5.1 ; C5.2 5.4,-3.45 5.8,-3.05 v1(5.8,-3) ; R2.1 5.8,18.3 6.362,17.738 6.362,17.438 v1(6.4,17.4) ; C6.2 5.75,15.65 6.262,16.162 6.262,16.362 v1(6.3,16.4)
  Bottom Layer w0.254: v1(-4,-10.5) -4,-10.553 -3.81,-10.743 P1.4
NetC1_1: C1.1 FB1.1 J1.A4_B9 J1.B4_A9 | length 11.2
  Top Layer w0.254: J1.B4_A9 -2.235,23.91 -2.235,24.486 -1.721,25 v1(1.1,25) ; C1.1 0.35,22.1 0.75,21.7 FB1.1
  Top Layer w0.5: FB1.1 1.898,21.7 2.25,22.052 2.25,22.6 v1(2.4,22.75) J1.A4_B9
  Bottom Layer w0.254: v1(1.1,25) 2.4,23.7 v1(2.4,22.75)
NetC3_1: C3.1 J1.SH1 J1.SH2 J1.SH3 J1.SH4 R3.1 | length 27.7
  Top Layer w0.254: R3.1 -5.65,15.6 -5.4,15.85 C3.1 -5.4,17.05 -5.473,17.123 -5.723,17.123 -6.4,17.8 -6.4,22.5 -5.201,23.699 -4.665,23.699 -4.32,24.044 J1.SH2
  Bottom Layer w0.254: J1.SH2 J1.SH4 J1.SH3 J1.SH1
NetD2_1: D2.1 R11.1 | length 2
  Top Layer w0.254: R11.1 D2.1
NetD3_1: D3.1 R13.1 | length 2
  Top Layer w0.254: R13.1 D3.1
NetJ1_A5: J1.A5 R2.2 | length 9.3
  Top Layer w0.254: J1.A5 1.273,23.768 1.273,24.314 2.859,25.9 4.5,25.9 5.5,24.9 R2.2
NetR4_2: R4.2 R6.2 U2.4 | length 5.4
  Top Layer w0.254: R6.2 3.577,7.377 4.2,8 4.2,9.6 3.5,10.3 R4.2 3.7,10.55 U2.4
NetR5_2: R5.2 U1.6 | length 6.3
  Top Layer w0.254: U1.6@3.444,-4.273 3.073,-4.273 U1.6 3.897,-4.25 4.147,-4.5 v1(4.2,-4.5) ; R5.2 6.077,-1.977 6.462,-2.362 6.462,-2.662 v1(6.5,-2.7)
  Bottom Layer w0.254: v1(4.2,-4.5) 5.7,-4.5 6.5,-3.7 v1(6.5,-2.7)
NetR11_2: R11.2 U3.11 | length 6.1
  Top Layer w0.254: R11.2 -5,6.2 -5.7,5.5 -5.7,4.6 -5.275,4.175 U3.11
NetR12_2: R12.2 U3.7 | length 3.3
  Top Layer w0.254: U3.7 -0.813,6.488 -0.813,7.237 v1(-0.8,7.25) ; v1(-0.3,8.95) -0.262,8.988 -0.16,8.988 0,9.148 R12.2
  Bottom Layer w0.254: v1(-0.8,7.25) -0.8,8.45 v1(-0.3,8.95)
NetR13_2: R13.2 U3.5 | length 5.4
  Top Layer w0.254: U3.5 0.475,6.633 0.542,6.7 5.15,6.7 R13.2
NetR14_2: R14.2 R15.2 | length 1.4
  Top Layer w0.254: R14.2 -1.398,9.348 -1.025,8.975 R15.2
NetR15_1: R15.1 U3.6 | length 1.6
  Top Layer w0.254: U3.6 R15.1
RTS: R9.1 U3.16 | length 3.6
  Top Layer w0.254: U3.16@0.503,2.497 U3.16 0.475,2.25 1.112,1.613 1.112,0.488 1.923,-0.323 R9.1
RXD: R8.1 U1.1 U3.2 | length 11.8
  Top Layer w0.254: U1.1 0.009,-3.25 0.032,-3.227 0.032,-2.868 0.275,-2.625 0.575,-2.625 v1(0.6,-2.6) ; U3.2 1.503,4.147 2.153,4.147 3.179,3.121 3.179,2.645 R8.1 3.323,1.077 v1(4.4,0)
  Bottom Layer w0.254: v1(0.6,-2.6) 1.8,-2.6 v1(4.4,0)
RXD_3V3: P1.3 U1.4 | length 7.9
  Top Layer w0.254: P1.3 -1.27,-5.97 -0.323,-5.023 -0.323,-4.773 -0.3,-4.75 U1.4
TXD: R7.1 U1.8 U3.15 | length 8.1
  Top Layer w0.254: U3.15 -0.175,2.25 -0.823,1.602 -0.823,-0.077 2.35,-3.25 U1.8
TXD_3V3: P1.2 U1.5 | length 8.1
  Top Layer w0.254: P1.2 1.27,-6.53 2.777,-5.023 2.777,-4.773 2.8,-4.75 U1.5
VCC: C2.1 C5.1 C8.1 C9.1 D1.5 FB1.2 SW1.1 TP1.1 U1.7 U2.1 U2.3 U3.9 U3.10 | length 60.1
  Top Layer w0.254: C9.1 -2.965,5 -2.79,4.825 U3.10 U3.9 -2.475,5.961 -2.7,6.186 v1(-2.7,6.2) ; v1(-2.8,13.5) -1.7,13.5 -1.523,13.677 -1.523,14.282 D1.5 ; U2.3 1.127,12.223 -0.151,12.223 -0.3,12.372 -0.3,12.785 0.186,13.271 0.186,13.386 0.61,13.81 1.033,13.81 1.173,13.95 U2.1 ; SW1.1 4.061,-6.439 4.761,-6.439 5.38,-5.82 5.38,-4.5 5.247,-4.367 5.167,-4.367 4.673,-3.873 4.673,-3.573 C5.1 ; C2.1 3.426,18.9 v1(4.1,18.9) ; U1.7 3.073,-3.727 3.792,-3.727 4.019,-3.5 C5.1 ; v1(4.016,-2.997) 4.396,-3.377 4.527,-3.377 4.6,-3.45 C5.1
  Top Layer w0.5: U2.1@1.173,13.95 1,14.123 C8.1 1.05,15.75 1.2,15.9 1.2,16.045 2.926,17.771 C2.1 3.176,19.65 FB1.2
  Layer 2 w0.254: v1(4.016,-2.997) 4.016,-2.944 3.652,-2.58 3.652,0.229 1.309,2.572 0.648,2.572 -1.696,4.915 -1.696,5.196 v1(-2.7,6.2) -2.7,6.253 -2.348,6.605 -2.348,11.683 -2.8,12.135 v1(-2.8,13.5) -1.3,13.5 v1(4.1,18.9)
  Bottom Layer w0.254: TP1.1 3.159,17 4.1,17.941 v1(4.1,18.9)
VCCIO: C13.1 R7.2 R8.2 R9.2 R10.2 U3.1 | length 19.4
  Top Layer w0.254: R7.2 -2.138,0.039 -2.138,0.762 v1(-2.1,0.8) ; v1@0,1.15 v1(0,1.2) ; U3.1 1.75,3.525 1.823,3.452 1.823,2.93 2,2.753 v1(2,2.7) 2,2.647 2.4,2.247 C13.1 2.4,0.85 3.062,0.188 3.062,-0.691 2.077,-1.677 R9.2 ; v1(4.4,1.7) 4.4,1.753 4.474,1.827 4.474,2.298 R8.2 ; R10.2 4.677,4.423 5.262,3.838 5.262,3.738 v1(5.3,3.7)
  Bottom Layer w0.254: v1(-2.1,0.8) -2.047,0.8 -1.647,1.2 v1(0,1.2) 0.038,1.238 0.538,1.238 v1(2,2.7) 3,1.7 v1(4.4,1.7) 5.3,2.6 v1(5.3,3.7)
VOUT: C4.1 P1.1 SW1.2 U1.3 | length 16.7
  Top Layer w0.254: C4.1 -1.873,-3.1 -1.8,-3.173 -1.8,-3.681 -1.229,-4.252 -0.771,-4.252 -0.769,-4.25 -0.096,-4.25 -0.073,-4.273 U1.3 -0.027,-4.273 0.573,-4.273 0.8,-4.5 0.8,-6.863 0,-7.663 SW1.2 0,-12.7 0.6,-13.3 1.9,-13.3 2.807,-12.393 3.417,-12.393 P1.1
pads on no net: J1.0 J1.A8 J1.B8 U3.12 U3.14

## Polygon pours and split planes (outlines as drawn)
3V3 on Layer 2 "3V3_L03_P002" (solid, pour order 2): -3.25,31.5 ccw(c-3.25,27.5) -7.25,27.5 -7.25,-10.5 ccw(c-3.25,-10.5) -3.25,-14.5 3.25,-14.5 ccw(c3.25,-10.5) 7.25,-10.5 7.25,27.5 ccw(c3.25,27.5) 3.25,31.5
GND on Layer 1 "GND_L02_P003" (solid, pour order 3): -3.222,31.516 ccw(c-3.222,27.516) -7.222,27.516 -7.222,-10.484 ccw(c-3.222,-10.484) -3.222,-14.484 3.278,-14.484 ccw(c3.278,-10.484) 7.278,-10.484 7.278,27.516 ccw(c3.278,27.516) 3.278,31.516

## Silkscreen, mask and mechanical layers (free items; w line width, h text height)
Top Overlay:
  text "btanqy 2024" at -6.387,5.52 h1 r270
  text "3V3" at -3.72,-5.52 h1
  text "5V" at 4.28,-5.52 h1
Mechanical 1:
  the board outline again, w0.254

## Text inside footprints (layer, text, board x,y; h text height)
J1: Mechanical 1 "PCB EDGE" at -5.4,31 h0.41 r180